# EAGLE board JDM2_2-Voltage_Pretty (EAGLE 7.2.0)
JDM2 with selectable Dual-Voltage
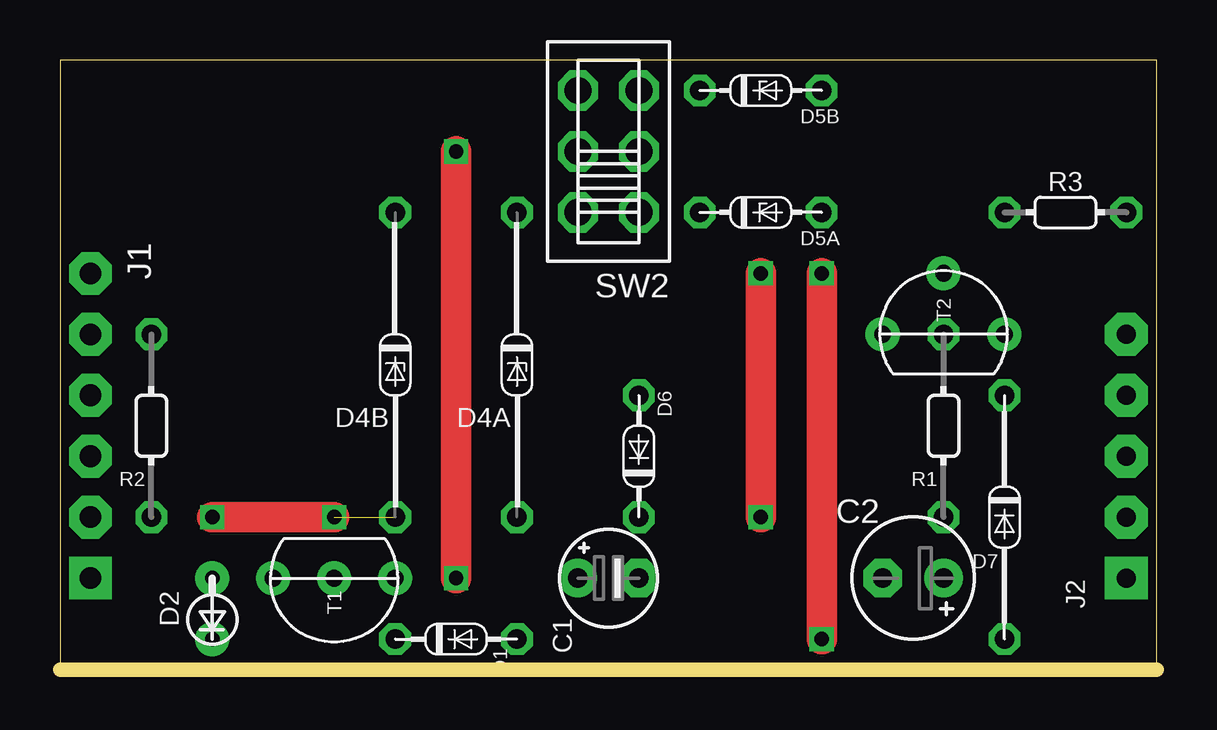
[diagram p0: board, top side]
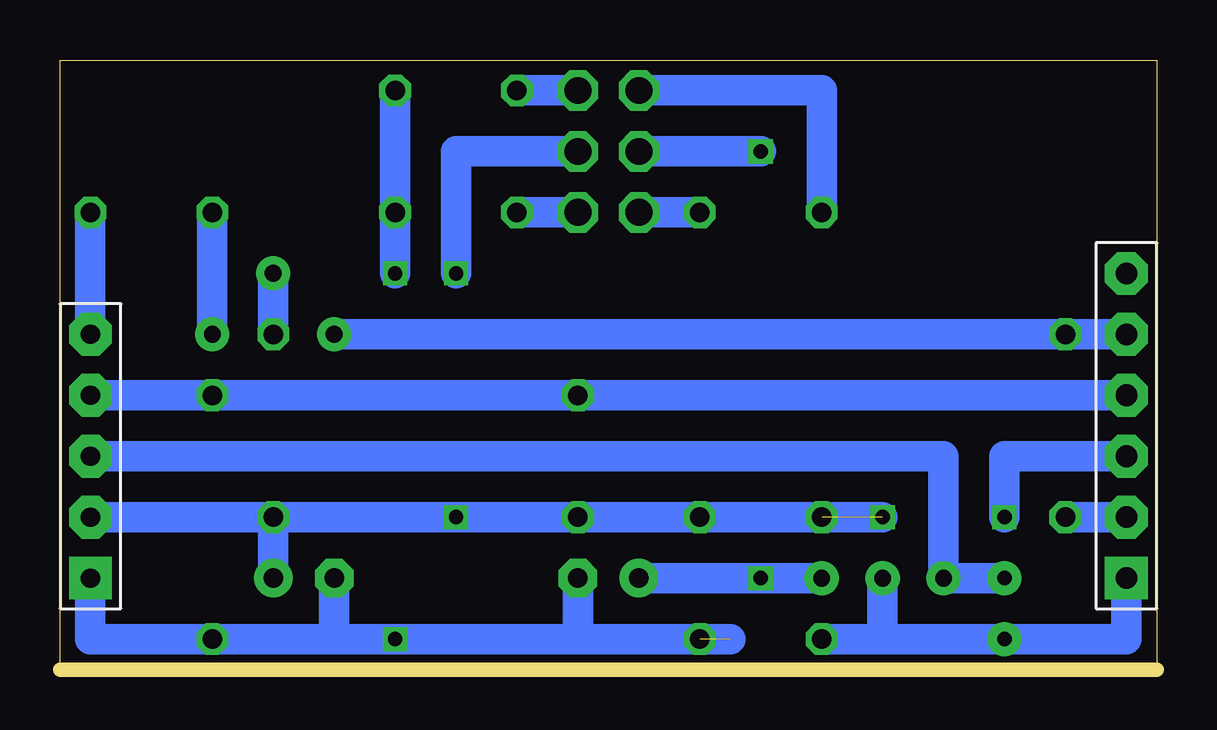
[diagram p1: board, bottom side, seen from below]

Size 45.72 x 25.4 mm. Coordinates in mm from the lower left corner, seen from the top.
Outline: 0,0 45.72,0 45.72,25.4 0,25.4 0,0
Copper layers (1*16): Top 0.035mm / dielectric 1.5mm / Bottom 0.035mm
Design rules "default": minimum track width 10mil, minimum drill 24mil, track to track 8mil, track to pad 8mil, pad to pad 8mil, via to via 8mil, smd to smd 8mil, copper to edge 40mil, drill to drill 8mil, minimum pad ring 10mil, minimum via ring 8mil, stop-mask expansion 4mil, vias tented up to drill 0mil, thermal gap 10mil
Net classes: 0 default: width 0.559 mm; 1 power: width 0.559 mm

## Footprints (pad centres in the part's own frame; a part is rotated, then mirrored left to right if it is on the bottom)
E2,5-4 = drill 0.813 pad 1.6: + 0,1.27 | drill 0.813 pad 1.6 octagon: - 0,-1.27
E2,5-5 = drill 0.813 pad 1.6: + 1.27,0 | drill 0.813 pad 1.6 octagon: - -1.27,0
DO34-5V = drill 0.813 octagon: A 0,2.54; C 0,-2.54
DO34-2,5-A = drill 0.6 pad 1.422: A 1.27,0; C -1.27,0
DO34Z12V = drill 0.813 octagon: A 0,6.35; C 0,-6.35
DO34Z5 = drill 0.813 octagon: A -2.54,0; C 2.54,0
DO34-5 = drill 0.813 octagon: A 2.54,0; C -2.54,0
DO34-10V = drill 0.813 octagon: A 0,5.08; C 0,-5.08
RS232-6PIN = drill 0.9 pad 1.778 square: 1 0,0 | drill 0.9 pad 1.778 octagon: 2 0,2.54; 3 0,5.08; 4 0,7.62; 5 0,10.16; 6 0,12.7
PIC-ICSP = drill 0.8 pad 1.778 square: 1 -5.08,0 | drill 0.8 pad 1.778 octagon: 2 -2.54,0; 3 0,0; 4 2.54,0; 5 5.08,0
0202/7-V = drill 0.813 octagon: 1 0,-3.81; 2 0,3.81
0202/5 = drill 0.813 octagon: 1 0,-2.54; 2 0,2.54
SLSW-2P2T = drill 1.118 pad 1.524 octagon: 1 -1.27,2.54; 2 -1.27,0; 3 -1.27,-2.54; 4 1.27,2.54; 5 1.27,0; 6 1.27,-2.54
TO92-CBE = drill 0.7 pad 1.422: B 0,0; C 0,2.54; E 0,-2.54
TO92-CBE-A = drill 0.7 pad 1.422: B 2.54,0; C 0,2.54; E 0,-2.54

## Placement (x,y rotation side)
C1  100μF  [E2,5-4]  22.86,3.81 90 top
C2  22μF  [E2,5-5]  35.56,3.81 0 top
D1  1N4148  [DO34-5V]  16.51,1.27 270 top
D2  1N4148  [DO34-2,5-A]  6.35,2.54 90 top
D4A  Z=5.1V  [DO34Z12V]  19.05,12.7 180 top
D4B  Z=8.1V  [DO34Z12V]  13.97,12.7 180 top
D5A  Z=3.3V  [DO34Z5]  29.21,19.05 180 top
D5B  Z=5.1V  [DO34Z5]  29.21,24.13 180 top
D6  1N4148  [DO34-5]  24.13,8.89 90 top
D7  1N4148  [DO34-10V]  39.37,6.35 180 top
J1  COMPORT-6PIN  [RS232-6PIN]  1.27,3.81 0 top
J2  PIC-ICSPICSP  [PIC-ICSP]  44.45,8.89 90 top
R1  10kΩ  [0202/7-V]  36.83,10.16 180 top
R2  1.5kΩ  [0202/7-V]  3.81,10.16 180 top
R3  100Ω  [0202/5]  41.91,19.05 90 top
SW2  SL-SW-2P-2T-SV  [SLSW-2P2T]  22.86,21.59 180 top
T1  BC547  [TO92-CBE]  11.43,3.81 270 top
T2  BC547  [TO92-CBE-A]  36.83,13.97 90 top

## Library data of the parts
C1 C2 = c
D1 D2 D4A D4B D5A D5B D6 D7 = d
J1 J2 = pinconn
R1-R3 = r
SW2 = sw
T1 T2 = t

## Nets
/MCLR: D2.A J2.3 T1.E
CLK: D6.A D7.C J1.4 J2.4
CTS: J1.5 R2.1 T2.C
DATA: R3.2 T2.E
GND: C1.- C2.- D1.A D5A.A D5B.A D7.A J2.1
N$1: R1.1 T2.B
N$2: D5A.C SW2.1
N$3: D5B.C SW2.3
N$4: D4A.C SW2.4
N$5: D4B.C SW2.6
N$7: J1.2 R2.2
PGD: J2.5 R3.1
TXD: D1.C D2.C J1.1 T1.B
VCC: C2.+ D4A.A D4B.A D6.C J1.3 J2.2 R1.2 SW2.2
VPP: C1.+ SW2.5 T1.C

## Tracks (layer width: path | path; a pad name or v marks a point on that pad's centre or on a via)
/MCLR
  Bottom 1.27: D2.A T1.E 8.89,8.89 J2.3
CLK
  Bottom 1.27: J2.4 D7.C D6.A J1.4
CTS
  Bottom 1.27: J1.5 R2.1 T2.C 30.48,13.97
DATA
  Bottom 1.27: T2.E R3.2
GND  (via drill 0.6)  (1 unrouted)
  Top 1.27: v31.75,1.27 v31.75,16.51
  Bottom 1.27: J2.1 44.45,1.27 D7.A v31.75,1.27 | C2.- 34.29,1.27 v31.75,1.27 | v31.75,1.27 24.13,1.27 | C1.- 24.13,1.27 | 24.13,1.27 17.78,1.27 | D5B.A D5A.A v31.75,16.51
N$1
  Bottom 1.27: R1.1 T2.B
N$2
  Bottom 1.27: D5A.C SW2.1
N$3
  Bottom 1.27: D5B.C SW2.3
N$4
  Bottom 1.27: D4A.C SW2.4
N$5
  Bottom 1.27: D4B.C 13.97,24.13 SW2.6
N$7
  Bottom 1.27: J1.2 R2.2
PGD
  Bottom 1.27: R3.1 J2.5
TXD
  Bottom 1.27: D2.C D1.C | T1.B 11.43,1.27 D2.C | J1.1 1.27,1.27 D2.C
VCC  (via drill 0.6)  (1 unrouted)
  Top 1.27: v6.35,6.35 v11.43,6.35 | v29.21,16.51 v29.21,6.35
  Bottom 1.27: J2.2 R1.2 | R1.2 v29.21,6.35 D6.C D4A.A v11.43,6.35 | R1.2 C2.+ | J1.3 6.35,8.89 v6.35,6.35 | SW2.2 29.21,21.59 v29.21,16.51
VPP  (via drill 0.6)
  Top 1.27: v16.51,21.59 v16.51,3.81
  Bottom 1.27: SW2.5 v16.51,21.59 | C1.+ v16.51,3.81 T1.C